# Altium PCB IPG_Rigid.PcbDoc (part 2 of 13)
Units mm, origin at the board's own origin, x right, y up, seen from the top; angles counter-clockwise.
Board outline 69.6 x 90.73 mm, 10 copper layers (TOP, DHOR, DVERT, GND 1, POWER, GND 2, GND 3, AVERT, AHOR, BOT), stack 1.198 mm thick; 745 components, 398 nets, 1997 pads, 2678 vias.
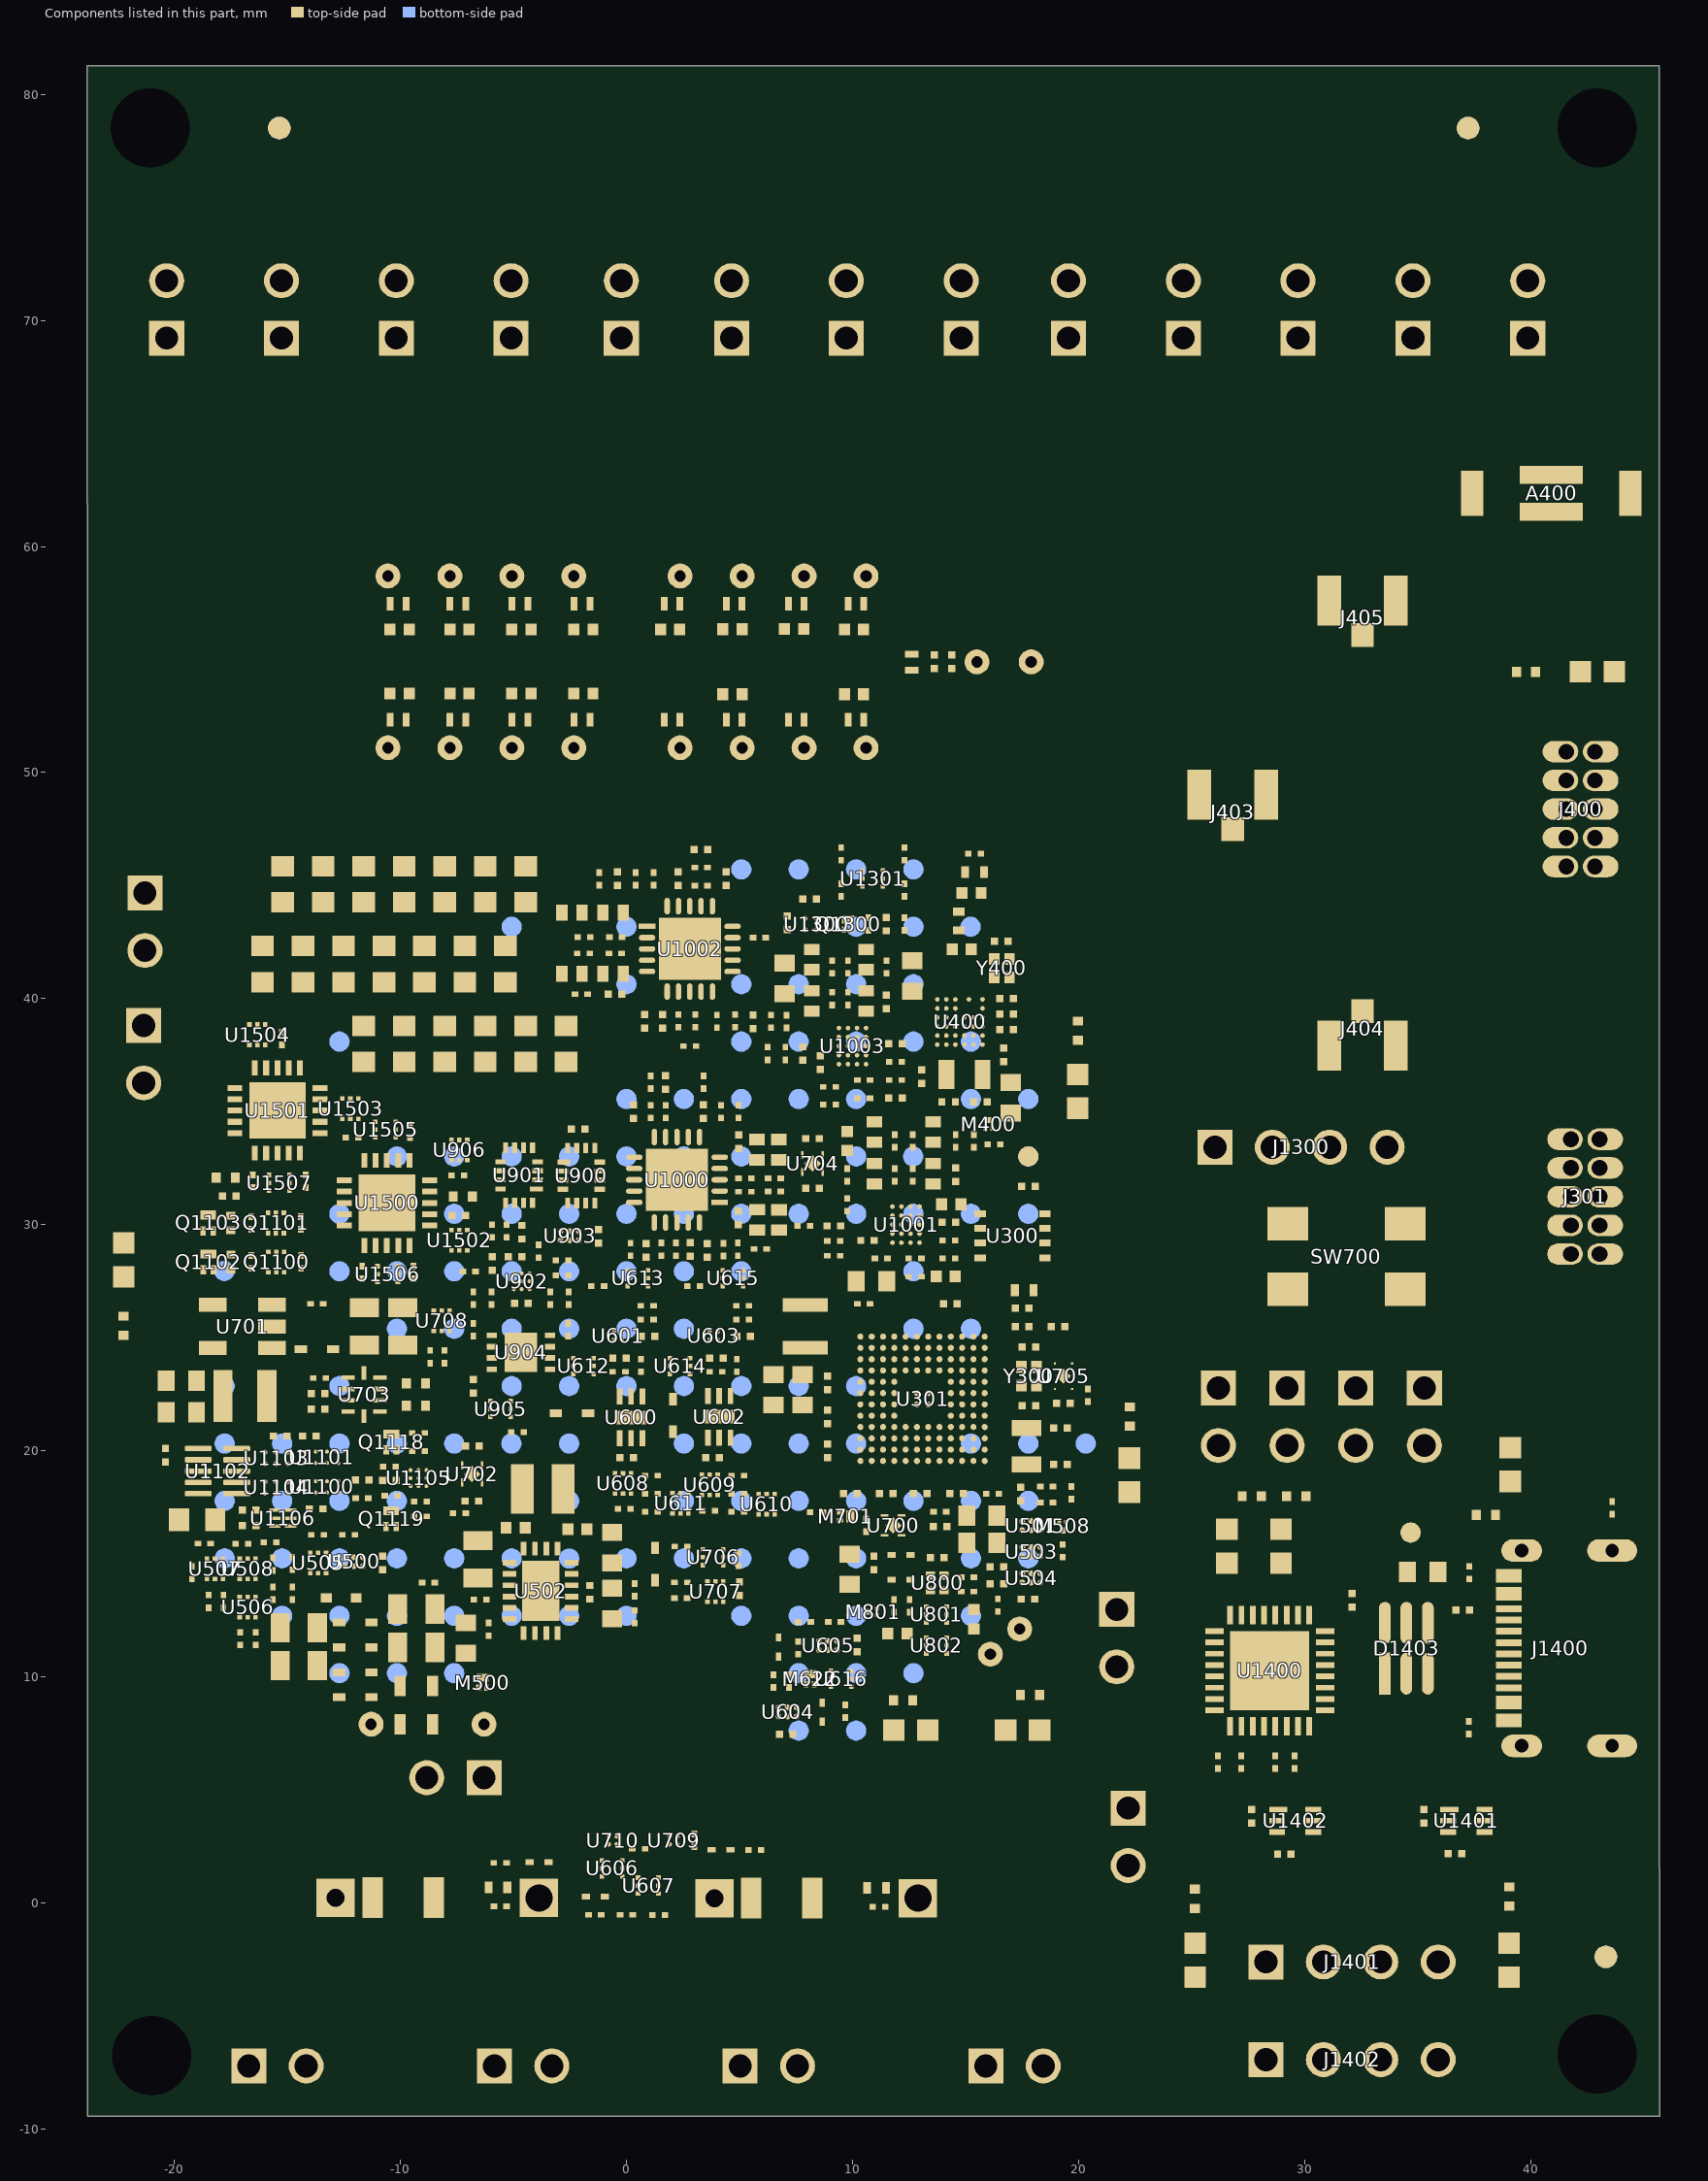
[diagram p10: the components of this part, seen from the top]

## Components (designator, comment, footprint, x,y, rotation, side; value= is the part's Value field where it differs from the comment) (continued)
R911 "CRCW02011M00FNED" R0201_C#1 -5.309,29.718 r90 top value=1M
R912 "CRCW0201200KFNED" R0201_C#1 -3.886,28.825 r270 top value=200k
R913 "CRCW0201120KFNED" R0201_C#1 -2.849,27.762 r0 top value=120k
R914 "CRCW0201100KFNED" R0201_C#1 -2.849,28.423 r0 top value=100k
R915 "CRCW020110M0FNED" R0201_C#1 -7.465,32.182 r0 top value=10M
R1000 "CRCW020110M0FNED" R0201_C#1 1.549,28.911 r90 top value=10M
R1001 "CRCW0201150KFNED" R0201_C#1 1.077,36.305 r90 top value=150k
R1002 "CRCW020110M0FNED" R0201_C#1 4.296,28.893 r90 top value=10M
R1003 "CRCW020110M0FNED" R0201_C#1 9.169,28.626 r0 top value=10M
R1004 "CRCW020110M0FNED" R0201_C#1 9.767,30.881 r90 top value=10M
R1005 "CRCW02011M40FNED" R0201_C#1 5.918,28.931 r180 top value=1.4M
R1006 "CRCW02011M40FNED" R0201_C#1 15.367,33.704 r90 top value=1.4M
R1007 "CRCW020110M0FNED" R0201_C#1 4.928,28.911 r270 top value=10M
R1008 "CRCW020110M0FNED" R0201_C#1 2.184,28.911 r270 top value=10M
R1009 "CRCW020110M0FNED" R0201_C#1 9.767,32.204 r90 top value=10M
R1010 "CRCW020110M0FNED" R0201_C#1 9.169,29.286 r180 top value=10M
R1011 "CRCW0201180KFNED" R0201_C#1 5.24,31.464 r180 top value=180k
R1012 "CRCW0201180KFNED" R0201_C#1 11.867,32.204 r270 top value=180k
R1013 "CRCW02010000Z0ED" R0201_C#1 11.267,28.504 r180 top value=0R
R1014 "CRCW02010000Z0ED" R0201_C#1 0.178,28.905 r90 top value=0R
R1015 "CRCW0201180KFNED" R0201_C#1 5.24,32.046 r180 top value=180k
R1016 "CRCW020110M0FNED" R0201_C#1 6.547,32.046 r0 top value=10M
R1017 "CRCW020110M0FNED" R0201_C#1 6.547,31.465 r0 top value=10M
R1018 "CRCW0201180KFNED" R0201_C#1 12.667,32.204 r270 top value=180k
R1019 "CRCW020110M0FNED" R0201_C#1 12.667,33.704 r90 top value=10M
R1020 "CRCW020110M0FNED" R0201_C#1 11.867,33.704 r90 top value=10M
R1021 "CRCW0201360KFNED" R0201_C#1 4.96,35 r270 top value=360k
R1022 "CRCW0201360KFNED" R0201_C#1 14.567,33.704 r270 top value=360k
R1023 "CRCW02012M20FNED" R0201_C#1 12.767,27.704 r0 top value=2M2
R1024 "CRCW02011M00FNED" R0201_C#1 12.767,28.504 r180 top value=1M
R1025 "CRCW02011M00FNED" R0201_C#1 3.404,36.305 r270 top value=1M
R1026 "CRCW0201150KFNED" R0201_C#1 4.18,35 r270 top value=150k
R1027 "CRCW02011M00FNED" R0201_C#1 14.267,29.304 r180 top value=1M
R1028 "CRCW0201100KFNED" R0201_C#1 1.732,35 r270 top value=100k
R1029 "CRCW0201249KFNED" R0201_C#1 14.267,28.504 r0 top value=249k
R1030 "CRCW0201910KFNED" R0201_C#1 1.077,35 r270 top value=910k
R1031 "CRCW020110M0FNED" R0201_C#1 3.3,45 r0 top value=10M
R1032 "CRCW020110M0FNED" R0201_C#1 6.239,37.575 r90 top value=10M
R1033 "CRCW0201150KFNED" R0201_C#1 3.048,39.014 r270 top value=150k
R1034 "CRCW020110M0FNED" R0201_C#1 1.2,45.3 r270 top value=10M
R1035 "CRCW02016M80FNED" R0201_C#1 8.978,35.319 r0 top value=6M8
R1036 "CRCW02011M40FNED" R0201_C#1 -1.2,45.3 r90 top value=1.4M
R1037 "CRCW02011M00FNED" R0201_C#1 6.4,39 r270 top value=1M
R1038 "CRCW020110M0FNED" R0201_C#1 0.4,45.3 r90 top value=10M
R1039 "CRCW020110M0FNED" R0201_C#1 3.3,45.8 r180 top value=10M
R1040 "CRCW02016M80FNED" R0201_C#1 7.087,38.989 r270 top value=6M8
R1041 "CRCW020110M0FNED" R0201_C#1 7.027,37.575 r270 top value=10M
R1042 "CRCW0201180KFNED" R0201_C#1 -0.48,42.723 r0 top value=180k
R1043 "CRCW0201180KFNED" R0201_C#1 9.1,40 r270 top value=180k
R1044 "CRCW02010000Z0ED" R0201_C#1 8.978,36.1 r180 top value=0R
R1045 "CRCW02010000Z0ED" R0201_C#1 5.876,42.7 r0 top value=0R
R1046 "CRCW0201180KFNED" R0201_C#1 -0.5,42 r0 top value=180k
R1047 "CRCW0201180KFNED" R0201_C#1 9.8,40 r270 top value=180k
R1048 "CRCW020110M0FNED" R0201_C#1 -1.9,42 r180 top value=10M
R1049 "CRCW020110M0FNED" R0201_C#1 -1.88,42.723 r180 top value=10M
R1050 "CRCW020110M0FNED" R0201_C#1 9.8,41.4 r90 top value=10M
R1051 "CRCW020110M0FNED" R0201_C#1 9.1,41.4 r90 top value=10M
R1052 "CRCW0201360KFNED" R0201_C#1 -2,40.2 r0 top value=360k
R1053 "CRCW0201360KFNED" R0201_C#1 11.5,41.4 r270 top value=360k
R1054 "RC0201FR-071M8L" R0201_C#1 10.5,35.6 r0 top value=1.8M
R1055 "RC0201FR-071M8L" R0201_C#1 10.5,36.4 r180 top value=1.8M
R1056 "CRCW02011M00FNED" R0201_C#1 2.8,37.9 r180 top value=1M
R1057 "CRCW0201150KFNED" R0201_C#1 2.3,39.014 r90 top value=150k
R1058 "CRCW02011M00FNED" R0201_C#1 11.9,37.2 r180 top value=1M
R1059 "CRCW0201100KFNED" R0201_C#1 4,39 r90 top value=100k
R1060 "CRCW0201249KFNED" R0201_C#1 11.9,36.4 r0 top value=249k
R1061 "CRCW0201910KFNED" R0201_C#1 4.8,39.02 r270 top value=910k
R1100 "RES_DNP_0201" R0201_C#2 -17.499,28.352 r270 top value=DNP
R1101 "RES_DNP_0201" R0201_C#2 -17.508,30.076 r270 top value=DNP
R1102 "CRCW02011K00FNED" R0201_C#1 -16.599,28.352 r270 top value=1k
R1103 "CRCW0201150RFNED" R0201_C#1 -14.399,28.352 r90 top value=150R
R1104 "CRCW02011K00FNED" R0201_C#1 -16.608,30.076 r270 top value=1k
R1105 "CRCW0201150RFNED" R0201_C#1 -14.408,30.076 r90 top value=150R
R1108 "CRCW020110K0FNED" R0201_C#1 -11.7,17.9 r180 top value=10k
R1148 "CRCW0201100RFNED" R0201_C#1 -10.49,19.304 r180 top value=100R
R1149 "CRCW02011M00FNED" R0201_C#1 -9.202,20.789 r180 top value=1M
R1150 "CRCW02012K80FNED" R0201_C#1 -9.202,19.989 r180 top value=2k8
R1151 "CRCW0201100RFNED" R0201_C#1 -10.414,18.009 r180 top value=100R
R1152 "CRCW02011M00FNED" R0201_C#1 -9.119,17.094 r180 top value=1M
R1153 "CRCW02012K80FNED" R0201_C#1 -9.119,17.755 r180 top value=2k8
R1300 "CRCW020110K0FNED" R0201_C#1 9.5,44.8 r270 top value=10k
R1301 "CRCW020110K0FNED" R0201_C#1 9.5,46.4 r90 top value=10k
R1302 "CRCW02010000Z0ED" R0201_C#1 12.3,44.8 r90 top value=6k8
R1303 "CRCW02010000Z0ED" R0201_C#1 12.3,46.4 r90 top value=6k8
R1304 "CRCW02010000Z0ED" R0201_C#1 10.7,43.3 r270 top value=6k8
R1305 "CRCW02010000Z0ED" R0201_C#1 12.3,43.3 r90 top value=0R
R1400 "CRCW0402200RFKEDHP" RES0402_REDUCED 38.024,17.17 r0 top value=200R
R1401 "CRCW02011K00FNED" R0201_C#1 27.203,6.227 r90 top value=1k
R1402 "CRCW02011K00FNED" R0201_C#1 26.162,6.227 r90 top value=1k
R1403 "CRCW0402200RFKEDHP" RES0402_REDUCED 29.635,17.988 r0 top value=200R
R1404 "CRCW02011K00FNED" R0201_C#1 28.702,6.227 r90 top value=1k
R1405 "CRCW02015K11FNED" R0201_C#1 37.262,7.747 r90 top value=5k11
R1406 "CRCW02011K00FNED" R0201_C#1 29.566,6.227 r90 top value=1k
R1407 "CRCW0402200RFKEDHP" RES0402_REDUCED 39.056,0.279 r270 top value=200R
R1408 "CRCW0402200RFKEDHP" RES0402_REDUCED 25.156,0.178 r270 top value=200R
R1409 "CRCW02015K11FNED" R0201_C#1 37.287,14.605 r270 top value=5k11
R1410 "CRCW02011M00FNED" R0201_C#1 43.612,17.475 r90 top value=1M
R1411 "CRCW0402200RFKEDHP" RES0402_REDUCED 27.667,17.988 r0 top value=200R
R1500 "CRCW0402499RFKEDHP" RES0402_REDUCED -7.24,31.242 r0 top value=499R
R1501 "CRCW0402499RFKEDHP" RES0402_REDUCED -17.729,32.08 r0 top value=499R
R1502 "CRCW02011M00FNED" R0201_C#1 -12.141,33.858 r0 top value=1M
R1503 "CRCW02011M00FNED" R0201_C#1 -9.576,34.138 r90 top value=1M
R1504 "CRCW02011M00FNED" R0201_C#1 -9.431,27.884 r90 top value=1M
R1505 "CRCW02011M00FNED" R0201_C#1 -11.691,27.884 r270 top value=1M
R1506 "CRCW02011M00FNED" R0201_C#1 -14.199,31.922 r90 top value=1M
R1507 "CRCW02011M00FNED" R0201_C#1 -16.533,31.922 r270 top value=1M
R1508 "CRCW02011M00FNED" R0201_C#1 -15.24,38.23 r270 top value=1M
SW700 "PTS647SN50SMTR2LFS" CK_PTS647 31.852,28.594 r270 top
TP300 "Test Point" testpad_0.9mm 5.08,22.86 r90 bottom value="Test point"
TP301 "Test Point" testpad_0.9mm 10.16,20.32 r90 bottom value="Test point"
TP302 "Test Point" testpad_0.9mm 7.62,22.86 r270 bottom value="Test point"
TP303 "Test Point" testpad_0.9mm 10.16,22.86 r270 bottom value="Test point"
TP304 "Test Point" testpad_0.9mm 17.78,30.48 r270 bottom value="Test point"
TP305 "Test Point" testpad_0.9mm 15.24,20.32 r90 bottom value="Test point"
TP400 "Test Point" testpad_0.9mm 12.7,45.72 r90 bottom value="Test point"
TP401 "Test Point" testpad_0.9mm 17.78,35.56 r270 bottom value="Test point"
TP402 "Test Point" testpad_0.9mm 12.7,43.18 r90 bottom value="Test point"
TP403 "Test Point" testpad_0.9mm 12.7,25.4 r270 bottom value="Test point"
TP404 "Test Point" testpad_0.9mm 12.7,40.64 r270 bottom value="Test point"
TP405 "Test Point" testpad_0.9mm 12.7,38.1 r270 bottom value="Test point"
TP406 "Test Point" testpad_0.9mm 15.24,35.56 r90 bottom value="Test point"
TP500 "Test Point" testpad_0.9mm -7.62,12.7 r270 bottom value="Test point"
TP501 "Test Point" testpad_0.9mm -10.16,12.7 r270 bottom value="Test point"
TP502 "Test Point" testpad_0.9mm -5.08,12.7 r270 bottom value="Test point"
TP503 "Test Point" testpad_0.9mm -12.7,10.16 r270 bottom value="Test point"
TP504 "Test Point" testpad_0.9mm -7.62,15.24 r270 bottom value="Test point"
TP505 "Test Point" testpad_0.9mm -15.24,12.7 r270 bottom value="Test point"
TP506 "Test Point" testpad_0.9mm -17.78,15.24 r270 bottom value="Test point"
TP507 "Test Point" testpad_0.9mm -10.16,10.16 r270 bottom value="Test point"
TP508 "Test Point" testpad_0.9mm 17.78,20.32 r270 bottom value="Test point"
TP509 "Test Point" testpad_0.9mm 17.78,17.78 r270 bottom value="Test point"
TP510 "Test Point" testpad_0.9mm 2.54,25.4 r270 bottom value="Test point"
TP511 "Test Point" testpad_0.9mm 17.78,15.24 r270 bottom value="Test point"
TP512 "Test Point" testpad_0.9mm 15.24,12.7 r270 bottom value="Test point"
TP513 "Test Point" testpad_0.9mm -12.7,12.7 r90 bottom value="Test point"
TP514 "Test Point" testpad_0.9mm -2.54,17.78 r90 bottom value="Test point"
TP515 "Test Point" testpad_0.9mm -7.62,10.16 r90 bottom value="Test point"
TP600 "Test Point" testpad_0.9mm -2.54,20.32 r270 bottom value="Test point"
TP601 "Test Point" testpad_0.9mm -2.54,22.86 r270 bottom value="Test point"
TP602 "Test Point" testpad_0.9mm -5.08,30.48 r90 bottom value="Test point"
TP603 "Test Point" testpad_0.9mm -2.54,12.7 r270 bottom value="Test point"
TP604 "Test Point" testpad_0.9mm -2.54,27.94 r270 bottom value="Test point"
TP605 "Test Point" testpad_0.9mm 5.08,15.24 r270 bottom value="Test point"
TP606 "Test Point" testpad_0.9mm -2.54,30.48 r270 bottom value="Test point"
TP607 "Test Point" testpad_0.9mm 0,27.94 r270 bottom value="Test point"
TP608 "Test Point" testpad_0.9mm -2.533,15.233 r270 bottom value="Test point"
TP609 "Test Point" testpad_0.9mm -12.7,30.48 r270 bottom value="Test point"
TP610 "Test Point" testpad_0.9mm 17.78,33.02 r270 top value="Test point"
TP611 "Test Point" testpad_0.9mm 5.08,45.72 r270 bottom value="Test point"
TP612 "Test Point" testpad_0.9mm 5.08,20.32 r270 bottom value="Test point"
TP613 "Test Point" testpad_0.9mm -5.08,43.18 r270 bottom value="Test point"
TP614 "Test Point" testpad_0.9mm 17.78,33.02 r270 bottom value="Test point"
TP615 "Test Point" testpad_0.9mm 5.08,30.48 r270 bottom value="Test point"
TP616 "Test Point" testpad_0.9mm -5.08,15.24 r270 bottom value="Test point"
TP617 "Test Point" testpad_0.9mm 15.24,17.78 r270 bottom value="Test point"
TP618 "Test Point" testpad_0.9mm 2.54,20.32 r270 bottom value="Test point"
TP619 "Test Point" testpad_0.9mm 2.54,22.86 r270 bottom value="Test point"
TP620 "Test Point" testpad_0.9mm 0,12.7 r270 bottom value="Test point"
TP621 "Test Point" testpad_0.9mm 2.54,27.94 r270 bottom value="Test point"
TP622 "Test Point" testpad_0.9mm 7.62,12.7 r270 bottom value="Test point"
TP623 "Test Point" testpad_0.9mm 5.08,27.94 r90 bottom value="Test point"
TP624 "Test Point" testpad_0.9mm 7.62,7.62 r270 bottom value="Test point"
TP625 "Test Point" testpad_0.9mm 10.16,12.7 r270 bottom value="Test point"
TP626 "Test Point" testpad_0.9mm 0,30.48 r270 bottom value="Test point"
TP627 "Test Point" testpad_0.9mm 0,22.86 r270 bottom value="Test point"
TP628 "Test Point" testpad_0.9mm 7.62,15.24 r90 bottom value="Test point"
TP629 "Test Point" testpad_0.9mm 2.54,15.24 r90 bottom value="Test point"
TP630 "Test Point" testpad_0.9mm 2.54,17.78 r90 bottom value="Test point"
TP631 "Test Point" testpad_0.9mm 7.62,17.78 r270 bottom value="Test point"
TP632 "Test Point" testpad_0.9mm 10.16,10.16 r270 bottom value="Test point"
TP633 "Test Point" testpad_0.9mm 10.16,7.62 r270 bottom value="Test point"
TP634 "Test Point" testpad_0.9mm 5.08,12.7 r270 bottom value="Test point"
TP635 "Test Point" testpad_0.9mm 7.62,10.16 r90 bottom value="Test point"
TP700 "Test Point" testpad_0.9mm 12.7,17.78 r270 bottom value="Test point"
TP701 "Test Point" testpad_0.9mm 10.16,17.78 r270 bottom value="Test point"
TP702 "Test Point" testpad_0.9mm 0,15.24 r270 bottom value="Test point"
TP703 "Test Point" testpad_0.9mm -17.78,22.86 r270 bottom value="Test point"
TP704 "Test Point" testpad_0.9mm -12.7,27.94 r270 bottom value="Test point"
TP705 "Test Point" testpad_0.9mm -12.7,38.1 r270 bottom value="Test point"
TP706 "Test Point" testpad_0.9mm 7.62,20.32 r270 bottom value="Test point"
TP707 "Test Point" testpad_0.9mm -10.16,27.94 r270 bottom value="Test point"
TP708 "Test Point" testpad_0.9mm -17.795,27.955 r270 bottom value="Test point"
TP709 "Test Point" testpad_0.9mm -5.08,22.86 r270 bottom value="Test point"
TP710 "Test Point" testpad_0.9mm 5.08,17.78 r270 bottom value="Test point"
TP711 "Test Point" testpad_0.9mm 5.08,33.02 r270 bottom value="Test point"
TP712 "Test Point" testpad_0.9mm 20.32,20.32 r270 bottom value="Test point"
TP713 "Test Point" testpad_0.9mm -5.095,20.32 r90 bottom value="Test point"
TP714 "Test Point" testpad_0.9mm 7.62,30.48 r90 bottom value="Test point"
TP800 "Test Point" testpad_0.9mm 10.16,15.24 r270 bottom value="Test point"
TP801 "Test Point" testpad_0.9mm 12.7,10.16 r270 bottom value="Test point"
TP802 "Test Point" testpad_0.9mm 15.24,25.4 r270 bottom value="Test point"
TP803 "Test Point" testpad_0.9mm 15.24,15.24 r270 bottom value="Test point"
TP900 "Test Point" testpad_0.9mm -7.62,25.4 r270 bottom value="Test point"
TP901 "Test Point" testpad_0.9mm 0,25.4 r270 bottom value="Test point"
TP902 "Test Point" testpad_0.9mm -5.08,27.94 r90 bottom value="Test point"
TP903 "Test Point" testpad_0.9mm -2.54,25.4 r270 bottom value="Test point"
TP904 "Test Point" testpad_0.9mm -10.16,25.4 r90 bottom value="Test point"
TP905 "Test Point" testpad_0.9mm 0,33.02 r90 bottom value="Test point"
TP906 "Test Point" testpad_0.9mm -2.54,33.02 r90 bottom value="Test point"
TP907 "Test Point" testpad_0.9mm -7.62,27.94 r90 bottom value="Test point"
TP908 "Test Point" testpad_0.9mm -10.16,30.48 r90 bottom value="Test point"
TP909 "Test Point" testpad_0.9mm -7.62,30.48 r90 bottom value="Test point"
TP910 "Test Point" testpad_0.9mm -5.08,25.4 r90 bottom value="Test point"
TP1000 "Test Point" testpad_0.9mm 2.54,33.02 r90 bottom value="Test point"
TP1001 "Test Point" testpad_0.9mm 12.7,27.94 r90 bottom value="Test point"
TP1003 "Test Point" testpad_0.9mm 5.08,40.64 r90 bottom value="Test point"
TP1004 "Test Point" testpad_0.9mm 10.16,38.1 r90 bottom value="Test point"
TP1005 "Test Point" testpad_0.9mm 12.7,30.48 r90 bottom value="Test point"
TP1006 "Test Point" testpad_0.9mm 0,35.56 r90 bottom value="Test point"
TP1007 "Test Point" testpad_0.9mm 7.62,38.1 r90 bottom value="Test point"
TP1008 "Test Point" testpad_0.9mm 7.62,35.56 r90 bottom value="Test point"
TP1009 "Test Point" testpad_0.9mm 15.24,30.48 r90 bottom value="Test point"
TP1010 "Test Point" testpad_0.9mm 10.16,30.48 r90 bottom value="Test point"
TP1011 "Test Point" testpad_0.9mm 2.54,30.48 r90 bottom value="Test point"
TP1012 "Test Point" testpad_0.9mm 10.16,35.56 r90 bottom value="Test point"
TP1013 "Test Point" testpad_0.9mm 5.08,38.1 r90 bottom value="Test point"
TP1014 "Test Point" testpad_0.9mm 5.08,35.56 r90 bottom value="Test point"
TP1015 "Test Point" testpad_0.9mm 2.54,35.56 r90 bottom value="Test point"
TP1016 "Test Point" testpad_0.9mm 10.16,33.02 r90 bottom value="Test point"
TP1017 "Test Point" testpad_0.9mm 12.685,33.02 r90 bottom value="Test point"
TP1018 "Test Point" testpad_0.9mm 0,43.18 r90 bottom value="Test point"
TP1019 "Test Point" testpad_0.9mm 7.62,40.64 r90 bottom value="Test point"
TP1020 "Test Point" testpad_0.9mm 0,40.64 r90 bottom value="Test point"
TP1021 "Test Point" testpad_0.9mm 10.16,40.64 r90 bottom value="Test point"
TP1100 "Test Point" testpad_0.9mm -15.24,20.32 r270 bottom value="Test point"
TP1101 "Test Point" testpad_0.9mm -17.78,17.78 r270 bottom value="Test point"
TP1104 "Test Point" testpad_0.9mm -15.24,17.78 r90 bottom value="Test point"
TP1105 "Test Point" testpad_0.9mm -7.62,20.32 r90 bottom value="Test point"
TP1107 "Test Point" testpad_0.9mm -12.7,17.78 r90 bottom value="Test point"
TP1108 "Test Point" testpad_0.9mm -10.16,17.78 r90 bottom value="Test point"
TP1109 "Test Point" testpad_0.9mm -10.16,20.32 r90 bottom value="Test point"
TP1110 "Test Point" testpad_0.9mm -12.7,15.24 r90 bottom value="Test point"
TP1111 "Test Point" testpad_0.9mm -17.78,20.32 r90 bottom value="Test point"
TP1112 "Test Point" testpad_0.9mm -10.16,15.24 r90 bottom value="Test point"
TP1113 "Test Point" testpad_0.9mm -12.7,20.32 r90 bottom value="Test point"
TP1114 "Test Point" testpad_0.9mm -12.7,22.86 r90 bottom value="Test point"
TP1115 "Test Point" testpad_0.9mm -15.24,15.24 r90 bottom value="Test point"
TP1300 "Test Point" testpad_0.9mm 7.62,45.72 r90 bottom value="Test point"
TP1301 "Test Point" testpad_0.9mm 10.16,43.18 r90 bottom value="Test point"
TP1302 "Test Point" testpad_0.9mm 10.16,45.72 r90 bottom value="Test point"
TP1402 "Test Point" testpad_0.9mm 34.696,16.383 r90 top value="Test point"
TP1405 "Test Point" testpad_0.9mm 15.24,38.1 r90 bottom value="Test point"
TP1406 "Test Point" testpad_0.9mm 15.225,43.18 r90 bottom value="Test point"
TP1500 "Test Point" testpad_0.9mm -5.08,33.02 r90 bottom value="Test point"
TP1501 "Test Point" testpad_0.9mm -7.62,33.02 r90 bottom value="Test point"
TP1502 "Test Point" testpad_0.9mm -10.16,33.02 r90 bottom value="Test point"
U300 "CY15B108QN-20LPXC" CY_002-18131_GQFN8 17.087,29.512 r0 top
U301 "STM32U585QII6Q" STM_UFBGA132 13.1,22.3 r180 top locked
U400 "NRF52810-CAAA-E-R7" NORDIC_WLCSP_2.482x2.464 14.753,38.968 r270 top
U500 "AD8505ACBZ-R7" AD8505ACBZ-R7 -12.065,15.091 r0 top
U501 "AD8505ACBZ-R7" AD8505ACBZ-R7 17.908,16.688 r180 top
U502 "LTC3130IUDC-1#PBF" LT_UDC-20_REDUCED -3.8,13.8 r0 top
U503 "AD8505ACBZ-R7" AD8505ACBZ-R7 17.917,15.532 r180 top
U504 "AD8505ACBZ-R7" AD8505ACBZ-R7 17.91,14.373 r180 top
U505 "DMC31D5UDJ-7" DIODESINC_SOT-963-6 -13.64,15.037 r270 top
U506 "DMN31D5UDJ-7" DIODESINC_SOT-963-6 -16.767,13.088 r270 top
U507 "DMC31D5UDJ-7" DIODESINC_SOT-963-6 -18.212,14.783 r90 top
U508 "DMN31D5UDJ-7" DIODESINC_SOT-963-6 -16.764,14.783 r90 top
U600 "LTC4065LEDC#TRPBF" LT_DC6 0.2,21.475 r270 top value=LTC4065LEDC#TRMPBF
U601 "TLV4021R1YKAR" TI_YKA0004 -0.377,25.087 r90 top
U602 "LTC4065LEDC#TRPBF" LT_DC6 4.1,21.5 r270 top value=LTC4065LEDC#TRMPBF
U603 "TLV4021R1YKAR" TI_YKA0004 3.856,25.087 r90 top
U604 "AD8505ACBZ-R7" AD8505ACBZ-R7 7.13,8.445 r0 top
U605 "AD8505ACBZ-R7" AD8505ACBZ-R7 8.915,11.382 r0 top
U606 "DMP22D5UDJ-7" DIODESINC_SOT-963-6 -0.635,1.524 r180 top
U607 "DMN31D5UDJ-7" DIODESINC_SOT-963-6 0.965,0.762 r0 top
U608 "DMC31D5UDJ-7" DIODESINC_SOT-963-6 -0.153,18.55 r270 top
U609 "DMC31D5UDJ-7" DIODESINC_SOT-963-6 3.683,18.491 r270 top
U610 "DMN31D5UDJ-7" DIODESINC_SOT-963-6 6.201,17.642 r90 top
U611 "DMN31D5UDJ-7" DIODESINC_SOT-963-6 2.388,17.678 r90 top
U612 "DMP22D5UDJ-7" DIODESINC_SOT-963-6 -1.905,23.749 r0 top
U613 "DMN31D5UDJ-7" DIODESINC_SOT-963-6 0.508,27.635 r0 top
U614 "DMP22D5UDJ-7" DIODESINC_SOT-963-6 2.362,23.749 r0 top
U615 "DMN31D5UDJ-7" DIODESINC_SOT-963-6 4.713,27.634 r0 top
U616 "DMP22D5UDJ-7" DIODESINC_SOT-963-6 9.5,9.912 r0 top
U700 "AP7354D-33FS4-7" "X2-DFN1010-4 (Type B)" 11.8,16.7 r90 top
U701 "LT1615ES5-1#TRPBF" LT_S5_L -17,25.5 r180 top
U702 "AP7354D-33FS4-7" "X2-DFN1010-4 (Type B)" -6.833,18.974 r180 top
U703 "ISL23315TFRUZ-T7A" RENESAS_L10.2.1X1.6A_UTQFN10 -11.616,22.484 r180 top
U704 "AP7354D-33FS4-7" "X2-DFN1010-4 (Type B)" 8.23,32.713 r180 top
U705 "TPS3831L30DQNR" TI_X2SON_DQN0004A 19.334,23.296 r270 top
U706 "DMC31D5UDJ-7" DIODESINC_SOT-963-6 3.833,15.291 r180 top
U707 "DMC31D5UDJ-7" DIODESINC_SOT-963-6 3.933,13.767 r270 top
U708 "DMC31D5UDJ-7" DIODESINC_SOT-963-6 -8.179,25.756 r270 top
U709 "MAX40200ANS+T" BGA4N35P2X2_72X72X50N 2.083,2.766 r90 top
U710 "MAX40200ANS+T" BGA4N35P2X2_72X72X50N -0.607,2.766 r90 top
U800 "ADL021-14E" NVE_ULLGA4 13.746,14.153 r270 top
U801 "DMP22D5UDJ-7" DIODESINC_SOT-963-6 13.716,12.751 r180 top
U802 "DMN31D5UDJ-7" DIODESINC_SOT-963-6 13.716,11.379 r180 top
U900 "DG4052EEN-T1-GE4" QFN40P180X260X60-16N-D -2.001,32.172 r0 top
U901 "DG4053EEN-T1-GE4" QFN40P180X260X60-16N-D -4.753,32.181 r180 top
U902 "TLV9002SIYCKR" TI_YCK0009 -4.638,27.497 r0 top
U903 "AD8505ACBZ-R7" AD8505ACBZ-R7 -2.515,29.512 r0 top
U904 "AD8137YCPZ-REEL7" AD_CP-8-13 -4.674,24.352 r0 top
U905 "DMC31D5UDJ-7" DIODESINC_SOT-963-6 -5.581,21.85 r0 top
U906 "DMC31D5UDJ-7" DIODESINC_SOT-963-6 -7.395,33.299 r270 top
U1000 "AD8232ACPZ-R7" FP-CP-20-8-IPC_C 2.232,31.987 r180 top
U1001 "AD8233ACBZ-R7" AD8233ACBZ-R7 12.367,30.004 r0 top
U1002 "AD8232ACPZ-R7" FP-CP-20-8-IPC_C 2.8,42.2 r0 top
U1003 "AD8233ACBZ-R7" AD8233ACBZ-R7 10,37.9 r0 top
U1100 "SN74LVC1G123YZPR" TI_YZP0008 -13.5,18.4 r90 top
U1101 "SN74LVC2G08YZPR" TI_YZP0008 -13.5,19.706 r90 top
U1102 "DAC80502DRXT" TI_DRX0010A -18.1,19.1 r0 top
U1103 "TS5A3159AYZPR" TI_YZP6 -15.5,19.681 r90 top
U1104 "TS5A3159AYZPR" TI_YZP6 -15.5,18.375 r90 top
U1105 "TLV9002SIYCKR" TI_YCK0009 -9.202,18.789 r270 top
U1106 "74LVC1G32GS,132" 74LVC1G3157GS132 -15.209,17.018 r90 top
U1300 "TS5A3159AYZPR" TI_YZP6 8.4,43.3 r90 top
U1301 "DMN31D5UDJ-7" DIODESINC_SOT-963-6 10.897,45.314 r0 top
U1400 "CY7C65215-32LTXI" PG-VQFN-32-803 28.461,10.27 r90 top
U1401 "TLV70237DSET" SON127P600-8N 37.16,3.632 r0 top
U1402 "TLV70237DSET" SON127P600-8N 29.591,3.632 r0 top
U1500 "ADG1634BCPZ-REEL7" AD_CP-20-10 -10.592,30.963 r270 top
U1501 "ADG1634BCPZ-REEL7" AD_CP-20-10 -15.452,35.052 r90 top
U1502 "DMN31D5UDJ-7" DIODESINC_SOT-963-6 -7.395,29.312 r270 top
U1503 "DMN31D5UDJ-7" DIODESINC_SOT-963-6 -12.217,35.128 r90 top
U1504 "DMN31D5UDJ-7" DIODESINC_SOT-963-6 -16.332,38.405 r90 top
U1505 "DMN31D5UDJ-7" DIODESINC_SOT-963-6 -10.668,34.208 r0 top
U1506 "DMN31D5UDJ-7" DIODESINC_SOT-963-6 -10.566,27.813 r180 top
U1507 "DMN31D5UDJ-7" DIODESINC_SOT-963-6 -15.367,31.852 r180 top
X100 "FIDUCIAL" Fid_IPC-7351B -15.366,78.513 r180 bottom
X101 "FIDUCIAL" Fid_IPC-7351B 43.332,-2.388 r180 bottom
X102 "FIDUCIAL" Fid_IPC-7351B 37.236,78.513 r180 bottom
X103 "FIDUCIAL" Fid_IPC-7351B -15.366,78.513 r0 top
X104 "FIDUCIAL" Fid_IPC-7351B 43.332,-2.388 r0 top
X105 "FIDUCIAL" Fid_IPC-7351B 37.236,78.513 r0 top
X106 "HOLE, UNPLATED" HOLE_UNPLATED_3.5MM -21.083,78.513 r0 top
X107 "HOLE, UNPLATED" HOLE_UNPLATED_3.5MM 42.953,-6.681 r0 top
X108 "HOLE, UNPLATED" HOLE_UNPLATED_3.5MM 42.953,78.513 r0 top
Y300 "ECS-480-10-48-CKY-TR" XTAL_ECS-SMD-CRYSTAL-10-48-CKY-TR 17.8,23.3 r270 top value="48 MHz"
Y301 "CM8V-T1A-32.768KHZ-6PF-20PPM-TA-QC" MICROCRYSTAL_CC8V-T1A 17.7,20.2 r90 top value=32.768kHz
Y400 "ECS-320-10-48-CKY-TR" XTAL_ECS-SMD-CRYSTAL-10-48-CKY-TR 16.612,41.351 r270 top value="32 MHz"
Y401 "CM8V-T1A-32.768KHZ-6PF-20PPM-TA-QC" MICROCRYSTAL_CC8V-T1A 14.952,36.648 r180 top value=32.768kHz

## Footprints (in the part's own frame and the unit in brackets; to place one, negate y for a bottom-side part, rotate by r counter-clockwise, add the part's x,y. Pads: shape width x height; smd on the part's side, far side on the other; paste and mask are expansions set on the pad)
74LVC1G3157GS132 [mm]
  rect 0.15x0.5 smd paste+0 mask+0.05: 1(-0.35,-0.35) 2(0,-0.35) 3(0.35,-0.35) 4(0.35,0.35) 5(0,0.35) 6(-0.35,0.35)
  silkscreen extent -0.71,-0.84 -0.36,-0.49, body extent -0.48,-0.53 0.48,0.53, height 0.36
217179-0001 [mm]
  rrect100% 1x1.8 hole 0.6 slot 1.4 at 90 deg paste-2539.97 mask+0: 1(-4.318,2.694) 2(4.322,2.694)
  rrect100% 1x2.2 hole 0.6 slot 1.8 at 90 deg paste-2539.97 mask+0: 3(-4.318,-1.306) 4(4.322,-1.306)
  rect 0.6x1.15 smd mask+0.051: A1(-3.2,3.269) A4(-2.4,3.269) A9(2.4,3.269) A12(3.2,3.269)
  rect 0.3x1.15 smd mask+0.051: A5(-1.25,3.269) A6(-0.25,3.269) A7(0.25,3.269) A8(1.25,3.269) B5(1.75,3.269) B6(0.75,3.269) B7(-0.75,3.269) B8(-1.75,3.269)
  body extent -4.47,-3.35 4.47,3.4, height 3.24
AD8233ACBZ-R7 [mil] "IC ECG FRONT END 20WLCSP"
  round 8 smd mask+2: A1(-23.62,-31.5) A2(-23.62,-15.75) A3(-23.62,0) A4(-23.62,15.75) A5(-23.62,31.5) B1(-7.87,-31.5) B2(-7.87,-15.75) B3(-7.87,0) B4(-7.87,15.75) B5(-7.87,31.5) C1(7.87,-31.5) C2(7.87,-15.75) C3(7.87,0) C4(7.87,15.75) C5(7.87,31.5) D1(23.62,-31.5) D2(23.62,-15.75) D3(23.62,0) D4(23.62,15.75) D5(23.62,31.5)
  silkscreen extent -37,-44 -27,-33, body extent -34,-40 34,40, height 22
AD8505ACBZ-R7 [mm] "AD8505ACBZ-6-Ball Wafer Level Chip Scale Package"
  round 0.26 smd mask+0.025: A1(0.4,0.2) A2(0.4,-0.2) B1(0,0.2) B2(0,-0.2) C1(-0.4,0.2) C2(-0.4,-0.2)
  silkscreen extent 0.5,0.26 0.74,0.51, body extent -0.69,-0.46 0.69,0.46, height 0.64
AD_CP-8-13 [mm] "PSON, 8-Leads, Body 3.00x3.00mm, Pitch 0.50mm, Thermal Pad 1.74x1.45mm, IPC High Density"
  rect 0.45x0.25 smd mask+0.051: 1(-1.285,0.75) 2(-1.285,0.25) 3(-1.285,-0.25) 4(-1.285,-0.75) 5(1.285,-0.75) 6(1.285,-0.25) 7(1.285,0.25) 8(1.285,0.75)
  rect 1.45x1.74 smd paste-0.725 mask+0.051: 9(0,0)
  silkscreen extent -1.6,-1.6 1.6,1.6, body extent -1.55,-1.55 1.55,1.55, height 0.8
AD_CP-20-10 [mm] "Quad Flat No-Lead (QFN with Tab), 0.50 mm pitch; square, 5 pin X 5 pin, 4.00 mm L X 4.00 mm W X 0.80 mm H body"
  rect 0.26x0.66 smd mask+0.051: 1(-1,-1.893) 2(-0.5,-1.893) 3(0,-1.893) 4(0.5,-1.893) 5(1,-1.893) 11(1,1.877) 12(0.5,1.877) 13(0,1.877) 14(-0.5,1.877) 15(-1,1.877)
  rect 0.66x0.26 smd mask+0.051: 6(1.885,-1.008) 7(1.885,-0.508) 8(1.885,-0.008) 9(1.885,0.492) 10(1.885,0.992) 16(-1.885,0.992) 17(-1.885,0.492) 18(-1.885,-0.008) 19(-1.885,-0.508) 20(-1.885,-1.008)
  rect 2.5x2.5 smd paste+0 mask+0.051: 21(0,-0.008)
  silkscreen extent -2.05,-2.06 -1.55,-1.56, body extent -2.05,-2.06 2.05,2.04, height 0.8
ANTENNA_2450AT43B100E [mm]
  rect 1x2 smd: 1(3.5,0) 2(-3.5,0)
  rect 2.8x0.8 smd: 3(0,0.815) 4(0,-0.815)
  silkscreen extent 1.75,-0.25 4.67,0.25
BAS116LSQYL [mm]
  rect 0.5x0.7 smd mask+0.051: 1(-0.45,0) 2(0.45,0)
  silkscreen extent -0.88,-0.34 -0.88,0.36, body extent -0.51,-0.3 0.51,0.3, height 0.38
BGA4N35P2X2_72X72X50N [mm]
  round 0.2 smd mask+0.025: A1(-0.175,0.175) A2(0.175,0.175) B1(-0.175,-0.175) B2(0.175,-0.175)
  silkscreen extent -0.53,0.29 -0.27,0.54, body extent -0.36,-0.36 0.36,0.36, height 0.5
C0201_C [mm] "C0201_C generated by IPC compliant footprint wizard"
  rect 0.32x0.32 smd mask+0.025: 1(-0.3,0) 2(0.3,0)
  TOP keep-out region: -0.113,-0.16 0.115,-0.16 0.115,0.16 -0.113,0.16
  body extent -0.32,-0.17 0.32,0.17, height 0.33
C0603 [mm] "C0603_B generated by IPC compliant footprint wizard"
  rect 0.9x1 smd mask+0.076: 1(-0.8,0) 2(0.8,0)
  body extent -0.9,-0.5 0.9,0.5, height 0.8
CAP0402_REDUCED [mm] "C0402_C generated by IPC compliant footprint wizard"
  rect 0.49x0.52 smd mask+0.051: 1(-0.425,0) 2(0.425,0)
  body extent -0.53,-0.28 0.53,0.28, height 0.6
CAP0603_REDUCED#1 [mm] "C0603_C generated by IPC compliant footprint wizard"
  rect 0.75x0.9 smd mask+0.076: 1(-0.675,0) 2(0.675,0)
  body extent -0.9,-0.5 0.9,0.5, height 0.8
CAP0603_REDUCED#2 [mm] "Chip Capacitor, Body 1.6x0.8mm, Height 1.0mm, IPC High Density"
  rect 0.5x0.9 smd: 1(-0.725,0) 2(0.725,0)
  body extent -0.87,-0.47 0.88,0.48, height 1
CAP0805_REDUCED [mm] "C0805_C generated by IPC compliant footprint wizard"
  rect 0.85x1.3 smd: 1(-0.825,0) 2(0.825,0)
  body extent -1.05,-0.67 1.05,0.67, height 1.35
CK_PTS647 [mm] "PB, 4-Leads, Body 6.5x4.5mm"
  rect 1.5x1.8 smd: 1(-1.45,-2.6) 2(-1.45,2.6) 3(1.45,-2.6) 4(1.45,2.6)
  silkscreen extent -3.05,-2.79 -2.8,-2.54, body extent -2.25,-3.25 2.25,3.25, height 5
CY_002-18131_GQFN8 [mm] "PSON, 8-Leads, Body 3.28x3.23mm, Pitch 0.65mm, IPC High Density"
  rect 0.5x0.3 smd: 1(-1.435,0.975) 2(-1.435,0.325) 3(-1.435,-0.325) 4(-1.435,-0.975) 5(1.435,-0.975) 6(1.435,-0.325) 7(1.435,0.325) 8(1.435,0.975)
  silkscreen extent -1.52,-1.73 1.25,1.73, body extent -1.64,-1.67 1.64,1.67, height 0.55
DIODESINC_SOT-963-6 [mm] "SOTFL, 6-Leads, Body 1.00x1.00mm, Pitch 0.35mm, IPC High Density"
  rect 0.2x0.2 smd mask+0.025: 1(-0.45,0.35) 2(-0.45,0) 3(-0.45,-0.35) 4(0.45,-0.35) 5(0.45,0) 6(0.45,0.35)
  silkscreen extent -0.72,0.28 -0.38,0.63, body extent -0.5,-0.52 0.5,0.52, height 0.5
DIODESINC_X1-DFN1006-3 [mm] "DFN, 3-Leads, Body 0.5x1.01mm, Pitch 0.65mm, IPC High Density"
  rect 0.4x0.25 smd: 1(-0.35,0.225) 2(-0.35,-0.225)
  rect 0.4x0.7 smd: 3(0.35,0)
  body extent -0.54,-0.27 0.54,0.28, height 0.53
DIODESINC_X2-DFN0604-3 [mm] "DFN, 3-Leads, Body 0.40x0.60mm, Pitch 0.48mm, IPC High Density"
  rect 0.18x0.16 smd: 1(-0.205,0.15) 2(-0.205,-0.15)
  rect 0.26x0.27 smd: 3(0.165,0)
  body extent -0.32,-0.23 0.33,0.22, height 0.4
DIODESINC_X2-DFN0606-3 [mm] "DFN, 3-Leads, Body 0.62x0.62mm, Pitch 0.34mm, IPC High Density"
  rect 0.28x0.2 smd paste+0 mask+0.076: 1(-0.24,0.175) 2(-0.24,-0.175)
  rect 0.35x0.54 smd paste-10 mask+0.076: 3(0.205,0)
  body extent -0.34,-0.34 0.34,0.34, height 0.4
FEEDHOLE_20mil [mm] "Feedthrough hole 20mil"
  round 1.1 hole 0.5: 1(0,0)
Fid_IPC-7351B [mm]
  round 1 smd paste-5 mask+1: Fid(0,0)
  TOP keep-out circle w1: c0,0 r1
FP-CP-20-8-IPC_C [mm]
  rect 0.731x0.239 smd paste+0 mask+0: 1(-1.891,1)
  rrect100% 0.731x0.239 smd paste+0 mask+0: 2(-1.891,0.5) 3(-1.891,0) 4(-1.891,-0.5) 5(-1.891,-1) 11(1.891,-1) 12(1.891,-0.5) 13(1.891,0) 14(1.891,0.5) 15(1.891,1)
  rrect100% 0.239x0.731 smd paste+0 mask+0: 6(-1,-1.891) 7(-0.5,-1.891) 8(0,-1.891) 9(0.5,-1.891) 10(1,-1.891) 16(1,1.891) 17(0.5,1.891) 18(0,1.891) 19(-0.5,1.891) 20(-1,1.891)
  rect 2.75x2.75 smd paste-1000 mask+0: 21(0,0)
  silkscreen extent -2.05,-2.05 2.05,2.05, body extent -2,-2 2,2, height 0.8
FP-SOT457-IPC_A [mm]
  rect 1.854x0.516 smd paste+0 mask+0: 1(-1.125,0.95)
  rrect100% 1.854x0.516 smd paste+0 mask+0: 2(-1.125,0) 3(-1.125,-0.95) 4(1.125,-0.95) 5(1.125,0) 6(1.125,0.95)
  silkscreen extent -1.81,1.41 -1.69,1.54, body extent -1.33,-1.45 1.43,1.45, height 1.1
FP-U_FL-R-SMT-1_10-MFG [mm]
  rect 1x1.05 smd: 1(0,-1.525)
  rect 1.05x2.2 smd: 2(1.475,0) 3(-1.475,0)
  body extent -1.5,-1.55 1.5,1.55, height 1.45
HOLE_UNPLATED_3.5MM [mm]
  round 0 hole 3.5 unplated paste-2539.97 mask+0.102: 1(0,0)
L0402_C [mm] "Chip Inductor, 2-Leads, Body 1.00x0.50mm, IPC High Density"
  rect 0.35x0.52 smd: 1(-0.415,0) 2(0.415,0)
  TOP keep-out region: -0.108,-0.362 0.108,-0.362 0.108,0.362 -0.108,0.362
  body extent -0.5,-0.25 0.5,0.25, height 0.54
LEDC0603 [mm]
  rect 0.95x0.95 smd: A(0.75,0) K(-0.75,0)
  silkscreen extent -2.03,-0.13 -1.78,0.13, body extent -0.83,-0.4 0.77,0.4, height 0.7
LITTELFUSE_440series_1206_REDUCED [mm] "Fuse, 2-Leads, Body 3.20x1.63mm, IPC High Density"
  rect 0.9x1.8 smd: 1(-1.35,0) 2(1.35,0)
  body extent -1.69,-0.86 1.69,0.86, height 0.86
LSEUC2520KKT6R8M [mm] "Inductor, Chip; 2.50 mm L X 2.00 mm W X 1.00 mm H body"
  rect 1x2.2 smd: 1(-0.9,0) 2(0.9,0)
  body extent -1.25,-1 1.25,1, height 1
LT_DC6 [mm] "SON, 6-Leads, Body 2.00x2.00mm, Pitch 0.50mm, Thermal Pad, IPC High Density"
  rect 0.7x0.25 smd: 1(-0.925,0.5) 2(-0.925,0) 3(-0.925,-0.5) 4(0.925,-0.5) 5(0.925,0) 6(0.925,0.5)
  rect 0.6x1.37 smd: 7(0,0)
  silkscreen extent -1.31,0.92 -1.19,1.03, body extent -1.05,-1.05 1.05,1.05, height 0.85
LT_S5_L [mm] "SOT23, 5-Leads, Body 2.90x2.80mm, Pitch 0.95mm, IPC High Density"
  rect 1.22x0.62 smd: 1(-1.31,0.95) 2(-1.31,0) 3(-1.31,-0.95) 4(1.31,-0.95) 5(1.31,0.95)
  body extent -1.5,-1.5 1.5,1.5, height 1.45
LT_UDC-20_REDUCED [mm] "QFN, 20-Leads, Body 3.00x4.00mm, Pitch 0.50mm, Thermal Pad 1.65x2.65mm, IPC High Density"
  rect 0.6x0.25 smd: 1(-1.375,1.25) 2(-1.375,0.75) 3(-1.375,0.25) 4(-1.375,-0.25) 5(-1.375,-0.75) 6(-1.375,-1.25) 11(1.375,-1.25) 12(1.375,-0.75) 13(1.375,-0.25) 14(1.375,0.25) 15(1.375,0.75) 16(1.375,1.25)
  rect 0.25x0.6 smd: 7(-0.75,-1.875) 8(-0.25,-1.875) 9(0.25,-1.875) 10(0.75,-1.875) 17(0.75,1.875) 18(0.25,1.875) 19(-0.25,1.875) 20(-0.75,1.875)
  rect 1.65x2.65 smd: 21(0,0)
  silkscreen extent -1.75,1.8 -1.3,2.25, body extent -1.55,-2.05 1.55,2.05, height 0.8
MICROCRYSTAL_CC8V-T1A [mm] "DFN, 2-Leads, Body 1.20x2.00mm, Pitch 1.47mm, IPC High Density"
  rect 0.7x1.3 smd: 1(-0.8,0) 2(0.8,0)
  body extent -1,-0.6 1,0.6, height 0.6
Negative_Battery_PTH [mm] "Negative terminal battery PTH connector for the QL0200I-A battery"
  rect 1.7x1.7 hole 0.8 mask+0.076: 1(0,0)
NORDIC_WLCSP_2.482x2.464 [mil]
  round 8 smd: A1(-39.37,39.37) A2(-23.62,39.37) A3(-7.87,39.38) A4(7.87,39.38) A5(23.62,39.38) A6(39.37,39.38) B3(-7.87,23.62) B4(7.87,23.62) B5(23.62,23.63) B6(39.37,23.63) C1(-39.37,15.75) D3(-7.87,7.87) D4(7.87,7.88) D5(23.62,7.88) D6(39.37,7.88) E1(-39.37,-7.88) E2(-23.62,-7.88) E3(-7.87,-7.88) E4(7.87,-7.87) E5(23.62,-7.87) E6(39.37,-7.87) F1(-39.37,-23.63) F2(-23.62,-23.63) F3(-7.87,-23.62) F4(7.87,-23.62) F5(23.62,-23.62) F6(39.37,-23.62) G1(-39.37,-39.38) G2(-23.62,-39.38) G3(-7.87,-39.38) G4(7.87,-39.38) G5(23.62,-39.37) G6(39.37,-39.37)
  silkscreen extent -53,-52 53,52, body extent -49,-48 49,48, height 21
NVE_ULLGA4 [mm] "PSON, 4-Leads, Body 1.10x1.10mm, Pitch 0.65mm, IPC High Density"
  rect 0.35x0.4 smd mask+0.051: 1(-0.325,0.3) 2(-0.325,-0.3) 3(0.325,-0.3) 4(0.325,0.3)
  silkscreen extent -0.69,0.47 -0.47,0.69, body extent -0.6,-0.6 0.6,0.6, height 0.4
ONSC_SOD-923_CASE514AB [mm]
  rect 0.36x0.25 smd: 1(0.42,0) 2(-0.42,0)
  silkscreen extent 0.82,-0.31 0.82,0.29, body extent -0.5,-0.33 0.5,0.33, height 0.4
PESD5V0S1BLD315 [mm]
  rect 0.3x0.6 smd mask+0.051: 1(-0.35,0) 2(0.35,0)
  silkscreen extent -0.96,-0.05 -0.86,0.05, body extent -0.51,-0.3 0.51,0.3, height 0.37
PG-VQFN-32-803 [mil]
  rect 32x10 smd paste+0 mask+2: 1(-96.5,68.9) 2(-96.5,49.21) 3(-96.5,29.53) 4(-96.5,9.84) 5(-96.5,-9.84) 6(-96.5,-29.53) 7(-96.5,-49.21) 8(-96.5,-68.9) 17(96.5,-68.9) 18(96.5,-49.21) 19(96.5,-29.53) 20(96.5,-9.84) 21(96.5,9.84) 22(96.5,29.53) 23(96.5,49.21) 24(96.5,68.9)
  rect 10x32 smd paste+0 mask+2: 9(-68.9,-96.5) 10(-49.21,-96.5) 11(-29.53,-96.5) 12(-9.84,-96.5) 13(9.84,-96.5) 14(29.53,-96.5) 15(49.21,-96.5) 16(68.9,-96.5) 25(68.9,96.5) 26(49.21,96.5) 27(29.53,96.5) 28(9.84,96.5) 29(-9.84,96.5) 30(-29.53,96.5) 31(-49.21,96.5) 32(-68.9,96.5)
  rect 138x138 smd paste+0 mask+2: 33(0,0)
  silkscreen extent -110,91 -91,110, body extent -101,-101 101,101, height 37
Positive_Battery_PTH [mm] "Positive terminal battery PTH connector for the QL0200I-A battery"
  rect 1.7x1.7 hole 1.2 mask+0.076: 1(0,0)
QFN40P180X260X60-16N-D [mm]
  rect 0.562x0.225 smd mask+0.045: 1(-0.768,0.6)
  rect 0.463x0.225 smd mask+0.045: 2(-0.818,0.2) 3(-0.818,-0.2) 4(-0.818,-0.6) 9(0.818,-0.6) 10(0.818,-0.2) 11(0.818,0.2) 12(0.818,0.6)
  rect 0.225x0.463 smd mask+0.045: 5(-0.6,-1.218) 6(-0.2,-1.218) 7(0.2,-1.218) 8(0.6,-1.218) 13(0.6,1.218) 14(0.2,1.218) 15(-0.2,1.218) 16(-0.6,1.218)
  silkscreen extent -1.32,1.23 -0.81,1.74, body extent -0.95,-1.35 0.95,1.35, height 0.6
R0201_C#1 [mm] "R0201_C generated by IPC compliant footprint wizard"
  rect 0.29x0.25 smd mask+0.051: 1(-0.28,0) 2(0.28,0)
  TOP keep-out region: -0.072,-0.176 0.073,-0.176 0.073,0.176 -0.072,0.176
  body extent -0.32,-0.17 0.32,0.17, height 0.26
R0201_C#2 [mm] "Chip Resistor, 2-Leads, Body 0.60x0.30mm, IPC High Density"
  rect 0.35x0.4 smd: 1(-0.325,0) 2(0.325,0)
  body extent -0.3,-0.15 0.3,0.15, height 0.3
R0603 [mm] "R0603_B generated by IPC compliant footprint wizard"
  rect 0.9x1 smd: 1(-0.8,0) 2(0.8,0)
  body extent -0.9,-0.5 0.9,0.5, height 0.5
RENESAS_L10.2.1X1.6A_UTQFN10 [mm]
  rect 0.6x0.2 smd: 1(-0.7,0.75) 2(-0.7,0.25) 3(-0.7,-0.25) 4(-0.7,-0.75) 6(0.7,-0.75) 7(0.7,-0.25) 8(0.7,0.25) 9(0.7,0.75)
  rect 0.2x0.6 smd: 5(0,-0.95) 10(0,0.95)
  silkscreen extent -0.98,1.14 -0.87,1.26, body extent -0.8,-1.05 0.8,1.05, height 0.56
RES0402_REDUCED [mm] "R0402_C generated by IPC compliant footprint wizard"
  rect 0.4x0.45 smd: 1(-0.425,0) 2(0.425,0)
  body extent -0.53,-0.28 0.53,0.28, height 0.4
SAMTEC_FTSH-105-01-XXX-D-K [mm]
  oval 0.95x1.575 hole 0.7 copper offset 0,-0.254 mask+0.076: 1(-2.54,-0.635) 3(-1.27,-0.635) 5(0,-0.635) 7(1.27,-0.635) 9(2.54,-0.635)
  oval 0.95x1.575 hole 0.7 copper offset 0,0.254 mask+0.076: 2(-2.54,0.635) 4(-1.27,0.635) 6(0,0.635) 8(1.27,0.635) 10(2.54,0.635)
  silkscreen extent -4.32,-1.59 -3.62,-0.19, body extent -3.17,-2.54 3.17,2.54, height 5.71
SMTC-TSW-102-26-XX-S [mm] ".025 SQ Post Terminal Strip Assembly, 1x2 Pins, Vertical, 2.54mm Pitch, Male"
  rect 1.55x1.55 hole 1.02: 1(0,0)
  round 1.55 hole 1.02: 2(2.54,0)
  silkscreen extent -1.53,-1.36 -1.53,1.35, body extent -1.4,-1.27 3.81,1.27, height 8.38
SMTC-TSW-104-07-X-S [mm] ".025 SQ Post Terminal Strip Assembly, 1x4 Pins, Vertical, 2.54mm Pitch, Male"
  rect 1.55x1.55 hole 1.02: 1(0,0)
  round 1.55 hole 1.02: 2(2.54,0) 3(5.08,0) 4(7.62,0)
  silkscreen extent -1.46,-1.27 9.08,1.27, body extent -1.4,-1.27 8.89,1.27, height 8.38
SODFL1608X70N [mm]
  rect 0.48x0.4 smd: 1(-0.66,0) 2(0.66,0)
  silkscreen extent -1.4,-0.25 -1.4,0.25, body extent -0.8,-0.4 0.8,0.4, height 0.7
SON127P600-8N [mm]
  rect 0.8x0.25 smd mask+0.051: 1(-0.75,0.5)
  rect 0.7x0.25 smd mask+0.051: 2(-0.8,0) 3(-0.8,-0.5) 4(0.8,-0.5) 5(0.8,0) 6(0.8,0.5)
  silkscreen extent -1.22,0.88 -1.12,0.97, body extent -0.82,-0.77 0.82,0.77, height 0.8
STM_SOD-523_R [mm]
  rect 0.55x0.35 smd: 1(-0.715,0) 2(0.715,0)
  silkscreen extent -0.99,0.54 -0.44,0.54, body extent -0.8,-0.45 0.8,0.45, height 0.7
STM_UFBGA132 [mm] "Ball Grid Array (BGA), 0.50 mm pitch, square; 132 pin, 7.00 mm L X 7.00 mm W X 0.60 mm H body"
  round 0.27 smd: A1(-2.75,2.75) A2(-2.25,2.75) A3(-1.75,2.75) A4(-1.25,2.75) A5(-0.75,2.75) A6(-0.25,2.75) A7(0.25,2.75) A8(0.75,2.75) A9(1.25,2.75) A10(1.75,2.75) A11(2.25,2.75) A12(2.75,2.75) B1(-2.75,2.25) B2(-2.25,2.25) B3(-1.75,2.25) B4(-1.25,2.25) B5(-0.75,2.25) B6(-0.25,2.25) B7(0.25,2.25) B8(0.75,2.25) B9(1.25,2.25) B10(1.75,2.25) B11(2.25,2.25) B12(2.75,2.25) C1(-2.75,1.75) C2(-2.25,1.75) C3(-1.75,1.75) C4(-1.25,1.75) C5(-0.75,1.75) C6(-0.25,1.75) C7(0.25,1.75) C8(0.75,1.75) C9(1.25,1.75) C10(1.75,1.75) C11(2.25,1.75) C12(2.75,1.75) D1(-2.75,1.25) D2(-2.25,1.25) D3(-1.75,1.25) D4(-1.25,1.25) D5(-0.75,1.25) D6(-0.25,1.25) D7(0.25,1.25) D8(0.75,1.25) D9(1.25,1.25) D10(1.75,1.25) D11(2.25,1.25) D12(2.75,1.25) E1(-2.75,0.75) E2(-2.25,0.75) E3(-1.75,0.75) E4(-1.25,0.75) E9(1.25,0.75) E10(1.75,0.75) E11(2.25,0.75) E12(2.75,0.75) F1(-2.75,0.25) F2(-2.25,0.25) F3(-1.75,0.25) F4(-1.25,0.25) F6(-0.25,0.25) F7(0.25,0.25) F9(1.25,0.25) F10(1.75,0.25) F11(2.25,0.25) F12(2.75,0.25) G1(-2.75,-0.25) G2(-2.25,-0.25) G3(-1.75,-0.25) G4(-1.25,-0.25) G6(-0.25,-0.25) G7(0.25,-0.25) G9(1.25,-0.25) G10(1.75,-0.25) G11(2.25,-0.25) G12(2.75,-0.25) H1(-2.75,-0.75) H2(-2.25,-0.75) H3(-1.75,-0.75) H4(-1.25,-0.75) H9(1.25,-0.75) H10(1.75,-0.75) H11(2.25,-0.75) H12(2.75,-0.75) J1(-2.75,-1.25) J2(-2.25,-1.25) J3(-1.75,-1.25) J4(-1.25,-1.25) J5(-0.75,-1.25) J6(-0.25,-1.25) J7(0.25,-1.25) J8(0.75,-1.25) J9(1.25,-1.25) J10(1.75,-1.25) J11(2.25,-1.25) J12(2.75,-1.25) K1(-2.75,-1.75) K2(-2.25,-1.75) K3(-1.75,-1.75) K4(-1.25,-1.75) K5(-0.75,-1.75) K6(-0.25,-1.75) K7(0.25,-1.75) K8(0.75,-1.75) K9(1.25,-1.75) K10(1.75,-1.75) K11(2.25,-1.75) K12(2.75,-1.75) L1(-2.75,-2.25) L2(-2.25,-2.25) L3(-1.75,-2.25) L4(-1.25,-2.25) L5(-0.75,-2.25) L6(-0.25,-2.25) L7(0.25,-2.25) L8(0.75,-2.25) L9(1.25,-2.25) L10(1.75,-2.25) L11(2.25,-2.25) L12(2.75,-2.25) M1(-2.75,-2.75) M2(-2.25,-2.75) M3(-1.75,-2.75) M4(-1.25,-2.75) M5(-0.75,-2.75) M6(-0.25,-2.75) M7(0.25,-2.75) M8(0.75,-2.75) M9(1.25,-2.75) M10(1.75,-2.75) M11(2.25,-2.75) M12(2.75,-2.75)
  silkscreen extent -3.55,-3.55 3.55,3.55, body extent -3.5,-3.5 3.5,3.5, height 0.6
TDK_VLS252010HBX-1 [mm] "Chip Inductor, 2-Leads, Body 2.50x2.00mm, IPC High Density"
  rect 0.6x2 smd: 1(-0.95,0) 2(0.95,0)
  body extent -1.25,-1 1.25,1, height 0.99
testpad_0.9mm [mm]
  round 0.9 smd paste-1: 1(0,0)
TI_DRX0010A [mm] "SON, 10-Leads, Body 2.50x2.50mm, Pitch 0.50mm, IPC High Density"
  rrect50% 1.2x0.24 smd: 1(-0.85,1) 2(-0.85,0.5) 3(-0.85,0) 4(-0.85,-0.5) 5(-0.85,-1) 6(0.85,-1) 7(0.85,-0.5) 8(0.85,0) 9(0.85,0.5) 10(0.85,1)
  silkscreen extent -1.55,-1.35 0.6,1.35, body extent -1.3,-1.3 1.3,1.3, height 0.8
TI_X2SON_DQN0004A [mm] "SON, 5-Leads, Body 1.00x1.00mm, Pitch 0.65mm, IPC High Density"
  rect 0.1x0.1 smd mask+0.051: 1(-0.56,0.38) 2(-0.56,-0.38) 3(0.56,-0.38) 4(0.56,0.38)
  rect 0.48x0.48 smd rot 135 mask+0.051: 5(0,0)
  TOP region: 0.25,-0.43 0.61,-0.43 0.61,-0.22 0.43,-0.22 0.25,-0.4
  TOP region: 0.25,0.43 0.61,0.43 0.61,0.22 0.43,0.22 0.25,0.4
  TOP region: -0.25,-0.43 -0.61,-0.43 -0.61,-0.22 -0.43,-0.22 -0.25,-0.4
  TOP region: -0.25,0.43 -0.61,0.43 -0.61,0.22 -0.43,0.22 -0.25,0.4
  silkscreen extent -0.82,0.3 -0.53,0.65, body extent -0.5,-0.5 0.5,0.5, height 0.4
TI_YCK0009 [mm] "BGA, 9-Leads, Body 0.95x0.95mmx0.33mm, Pitch 0.35mm"
  round 0.18 smd mask+0.025: A1(-0.35,0.35) A2(0,0.35) A3(0.35,0.35) B1(-0.35,0) B2(0,0) B3(0.35,0) C1(-0.35,-0.35) C2(0,-0.35) C3(0.35,-0.35)
  silkscreen extent -0.6,0.3 -0.3,0.6, body extent -0.48,-0.48 0.48,0.48, height 0.33
TI_YKA0004 [mm] "BGA, 4-Leads, Body 0.70x0.70mmx0.40mm, Pitch 0.35mm"
  round 0.2 smd mask+0.025: A1(-0.175,0.175) A2(0.175,0.175) B1(-0.175,-0.175) B2(0.175,-0.175)
  silkscreen extent -0.45,0.2 -0.2,0.45, body extent -0.35,-0.35 0.35,0.35, height 0.4
TI_YZP6 [mm] "BGA, 6-Leads, Body 0.89x1.39mmx0.50mm, Pitch 0.50mm"
  round 0.225 smd mask+0.076: 1(-0.25,0.5) 2(-0.25,0) 3(-0.25,-0.5) 4(0.25,-0.5) 5(0.25,0) 6(0.25,0.5)
  silkscreen extent -0.58,0.55 -0.3,0.83, body extent -0.45,-0.69 0.45,0.69, height 0.5
TI_YZP0008 [mm] "BGA, 8-Leads, Body 0.89x1.89mmx0.50mm, Pitch 0.50mm"
  round 0.178 smd mask+0.076: 1(-0.25,0.75) 2(-0.25,0.25) 3(-0.25,-0.25) 4(-0.25,-0.75) 5(0.25,-0.75) 6(0.25,-0.25) 7(0.25,0.25) 8(0.25,0.75)
  silkscreen extent -0.55,0.85 -0.35,1.05, body extent -0.45,-0.94 0.45,0.94, height 0.5
WURTH_74438323100_REDUCED [mm] "Inductor, Chip; 2.50 mm L X 2.00 mm W X 1.00 mm H body"
  rect 0.85x2.3 smd: 1(-0.975,0) 2(0.975,0)
  body extent -1.25,-1 1.25,1, height 1
"X2-DFN1010-4 (Type B)" [mm] "DFN, 5-Leads, Body 1.00x1.10mm, Pitch 0.65mm"
  rect 0.112x0.35 smd mask+0.025: 1(-0.444,-0.375) 2(0.444,-0.375) 3(0.444,0.375) 4(-0.444,0.375)
  rect 0.53x0.53 smd rot 45 mask+0.025: 5(0,0)
  TOP region: 0.388,-0.2 0.5,-0.2 0.5,-0.55 0.15,-0.55 0.15,-0.438
  TOP region: -0.388,-0.2 -0.5,-0.2 -0.5,-0.55 -0.15,-0.55 -0.15,-0.438
  TOP region: 0.388,0.2 0.5,0.2 0.5,0.55 0.15,0.55 0.15,0.438
  TOP region: -0.388,0.2 -0.5,0.2 -0.5,0.55 -0.15,0.55 -0.15,0.438
  silkscreen extent -0.67,-0.72 -0.33,-0.38, body extent -0.5,-0.5 0.5,0.5, height 0.4
XTAL_ECS-SMD-CRYSTAL-10-48-CKY-TR [mm]
  rect 0.52x0.47 smd mask+0.048: 1(-0.41,-0.335) 2(0.41,-0.335) 3(0.41,0.335) 4(-0.41,0.335)
  silkscreen extent -0.86,-0.76 -0.44,-0.39, body extent -0.6,-0.5 0.6,0.5, height 0.33

## Part data
A400: library part CMP-100-000000-1, "2.4GHz Bluetooth, Wi-Fi, WLAN Chip RF Antenna 2.4GHz ~ 2.5GHz 1.3dBi Solder Surface Mount", Package=None, Component Type=Standard, Design Item ID=2450AT43B100E, Digi-Key_Part_Number=712-1010-1-ND, Digi-Key_Purchase_URL=https://www.digikey.com.br/product-detail/en/johanson-technology-inc/2450AT43B100E/712-1010-1-ND/1560839?utm_source=snapeda&utm_medium=aggregator&utm_campaign=symbol, MF="Johanson Technology", MP=2450AT43B100E, Pin Count=1, SnapEDA_Link=https://www.snapeda.com/parts/2450AT43B100E/Johanson%20Technology%20Inc./view-part/245562/?ref=snap, Source=SnapEDAsch.SchLib
C300 C301 C305 C306 C400 C403 C406 C407: "Ceramic Capacitor, Multilayer, Ceramic, 25V, 5% +Tol, 5% -Tol, C0G, 30ppm/Cel TC, 0.000012uF, Surface Mount, 0201", Capacitor Type=Ceramic, Case/Package=0201, Manufacturer=Murata, Max Operating Temperature=125°C, Min Operating Temperature=-55°C, Package Shape=Rectangular, Rated DC Voltage (URdc)=25V, Supplier Part Number=490-3144-1-ND, Temperature Characteristics Code=C0G, Tolerance  (fill in as +-)=5%, Category="Ceramic Capacitors", ComponentLink1Description=https://datasheet.ciiva.com:443/pdfs/VipMasterIC/IC/MURE/MURE-S-A0004347008/MURE-S-A0004348737-1.pdf?src-supplier=IHS+Markit, ComponentLink1URL=https://datasheet.ciiva.com:443/pdfs/VipMasterIC/IC/MURE/MURE-S-A0004347008/MURE-S-A0004348737-1.pdf?src-supplier=IHS+Markit, Dielectric Material=Ceramic, JESD-609 Code=e3, Manufacturer Part Number=GRM0335C1E120JA01D, Mounting Technology="Surface Mount", Multilayer=Yes, Packaging="Tape and Reel", Pins=2, Pricing="1=0,1, 10=0,011, 50=0,0062, 100=0,0048, 500=0,0036, 1000=0,00283, 2500=0,00258, 5000=0,00237 (USD)", Reach SVHC Compliant=Yes, RoHS=Yes, RoHS Compliant=Yes, Stock=4384132, Supplier=Digikey, Supplier 1="Arrow Electronics", Supplier Part Number 1=GRM0335C1E120JA01D, Terminal Finish=Nickel, Termination=Wraparound, Tolerance (fill in as +-)=5%
C302 C303 C313 C314 C319 C405 C508 C509 C512 C701 C702 C705 C1400: "Capacitor, 4.7uF, X5R, 16V, 10%, 0603, Implant-grade", Manufacturer=Murata, Medical Grade MFR PN=GCH188R61C475KE11, Package Description=0603, Rating=16V, Supplier Part Number 1=GRM188R61C475KE11D, Category=Capacitor, Length (mm)="1.60 ±0.10", Manufacturer Part Number=GRM188R61C475KE11, Medical Grade MFR=Murata, PCB Footprint=cap0603_reduced, Supplier 1="Arrow Electronics", Thickness (mm)="0.80 ±0.10", Width (mm)="0.80 ±0.10"
C304 C307 C308 C309 C310 C311 C312 C315 C316 C318 C320 C404 C408 C510 C514 C515 C516 C517 C601 C604 C606 C607 C700 C706 C707 C708 C709 C710 C711 C712 C713 C801 C900 C901 C902 C903 C904 C905 C906 C1003 C1004 C1005 C1006 C1018 C1019 C1020 C1021 C1026 C1028 C1100 C1102 C1109 C1112 C1114 C1115 C1117 C1300 C1302 C1401 C1405 C1407 C1500 C1501: "Ceramic Capacitor, Multilayer, Ceramic, 25V, 10% +Tol, 10% -Tol, X5R, 15% TC, 0.1uF, Surface Mount, 0201", Capacitor Type=Ceramic, Case/Package=0201, Manufacturer=Murata, Max Operating Temperature=85°C, Min Operating Temperature=-55°C, Package Shape=Rectangular, Package Style=SMTMeter, Rated DC Voltage (URdc)=25V, Supplier Part Number=490-14571-1-ND, Temperature Characteristics Code=X5R, Tolerance  (fill in as +-)=10%, Category="Ceramic Capacitors", ComponentLink1Description=https://psearch.en.murata.com:443/capacitor/product/GRM033R61E104KE14%23.pdf?src-supplier=IHS+Markit, ComponentLink1URL=https://psearch.en.murata.com:443/capacitor/product/GRM033R61E104KE14%23.pdf?src-supplier=IHS+Markit, ComponentLink2Description=http://www.mouser.com/ds/2/281/c02e-2905.pdf?src-supplier=Mouser, ComponentLink2URL=http://www.mouser.com/ds/2/281/c02e-2905.pdf?src-supplier=Mouser, ComponentLink3Description=http://search.murata.co.jp/Ceramy/image/img/A01X/G101/ENG/GRM033R61E104KE14-01.pdf?src-supplier=Digikey, ComponentLink3URL=http://search.murata.co.jp/Ceramy/image/img/A01X/G101/ENG/GRM033R61E104KE14-01.pdf?src-supplier=Digikey, ComponentLink4Description=https://search.murata.co.jp/Ceramy/image/img/A01X/G101/ENG/GRM033R61E104KE14-01.pdf?src-supplier=Digikey, ComponentLink4URL=https://search.murata.co.jp/Ceramy/image/img/A01X/G101/ENG/GRM033R61E104KE14-01.pdf?src-supplier=Digikey, Dielectric Material=Ceramic, Height=0.3mm, JESD-609 Code=e3, Length=0.6mm, Manufacturer Part Number=GRM033R61E104KE14J, Mounting Technology="Surface Mount", Multilayer=Yes, Packaging="Tape and Reel", Pins=2, Pricing="1=0,1, 10=0,033, 50=0,0192, 100=0,0148, 500=0,01118, 1000=0,00878, 2500=0,00798, 5000=0,00734 (USD)", Reach SVHC Compliant=Yes, RoHS=Yes, RoHS Compliant=Yes, Stock=1540851, Supplier=Digikey, Supplier 1="Arrow Electronics", Supplier Part Number 1=GRM033R61E104KE14J, Terminal Finish=Nickel, Termination=Wraparound, Tolerance (fill in as +-)=10%, Width=0.3mm
C317 C410 C600 C603 C714 C1301 C1402 C1404 C1406: "Ceramic Capacitor, Multilayer, Ceramic, 16V, 20% +Tol, 20% -Tol, X5R, 15% TC, 1uF, Surface Mount, 0201", Manufacturer=Murata, Rated DC Voltage (URdc)=16V, Supplier Part Number=490-18654-1-ND, Category="Ceramic Capacitors", Manufacturer Part Number=GRM033R61C105ME15D, Pricing="1=0,16, 10=0,105, 50=0,0628, 100=0,0493, 500=0,03644, 1000=0,03017, 2500=0,02808, 5000=0,02569 (USD)", RoHS=No, Stock=132893, Supplier=Digikey, Supplier 1=Avnet, Supplier Part Number 1=GRM033R61C105ME15D
C401: "Capacitor, 0.8pF, Silicon RF, 200V, Tolerance 0.05pF, 0402, Implant-grade", Dielectric=-, Manufacturer="Kyocera AVX", Medical Grade Manufacturer=TBD, Supplier Part Number 1=581-600L0R8AT, Temperature Coefficient="30 ppm/°C", Tolerance=0.05pF, Voltage Rating=200V, Category=Capacitor, Height=0.6mm, Length=1.05mm, Manufacturer Part Number=600L0R8AT200T, Medical Grade Manufacturer Part Number=TBD, Size Code=0402, Supplier=TBD, Supplier 1=Mouser, Supplier Part Number=TBD, Width=0.51mm
C402: "Capacitor, 1pF, RF Capacitors, 200V, Tolerance 0.01pF, 0402, Implant-grade", Dielectric=-, Manufacturer="Kyocera AVX", Medical Grade Manufacturer=TBD, Supplier Part Number 1=581-600L1R0AT, Temperature Coefficient="30 ppm/°C", Tolerance=0.01pF, Voltage Rating=200V, Category=Capacitor, Height=0.6mm, Length=1.02mm, Manufacturer Part Number=600L1R0AT200T, Medical Grade Manufacturer Part Number=TBD, Size Code=0402, Supplier=TBD, Supplier 1=Mouser, Supplier Part Number=TBD, Width=0.51mm